# Altium PCB Altium_PCB_v03_CLOCK_4Plane.pcbdoc
Units mil, origin at the board's own origin, x right, y up, seen from the top; angles counter-clockwise.
Board outline 11875.51 x 6799.21 mil, 4 copper layers (Top Layer, GROUND, 5V, Bottom Layer); 41 components, 26 nets, 145 pads, 0 vias.
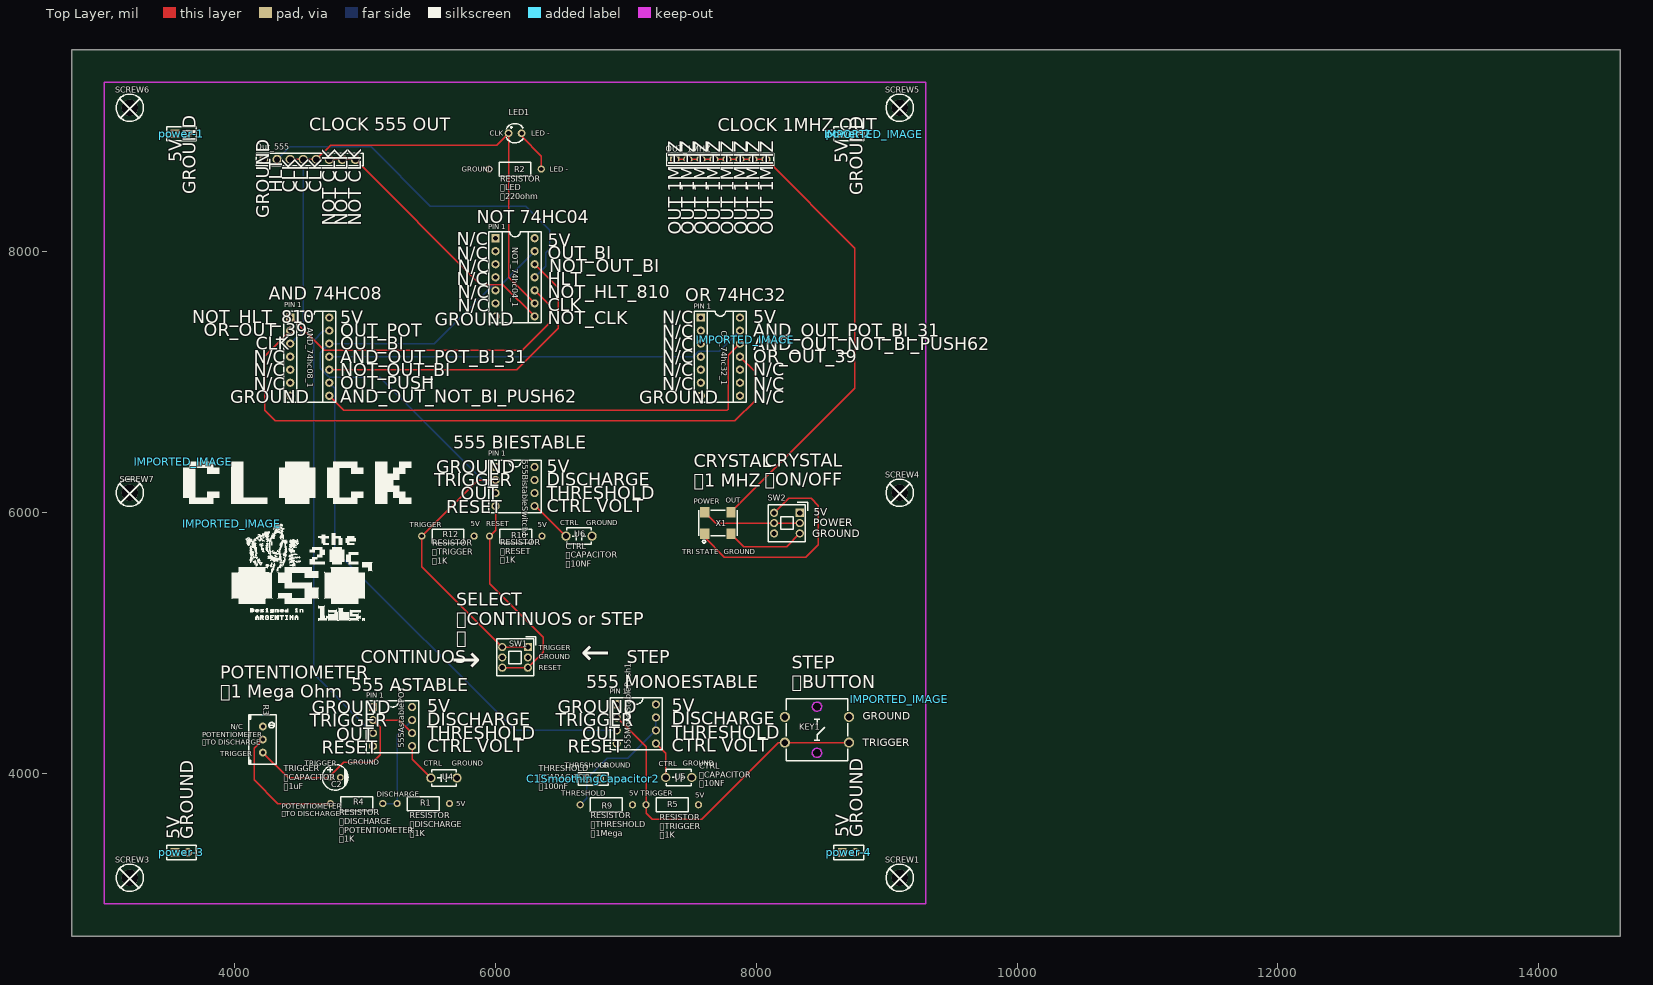
[diagram p0: Top Layer view]
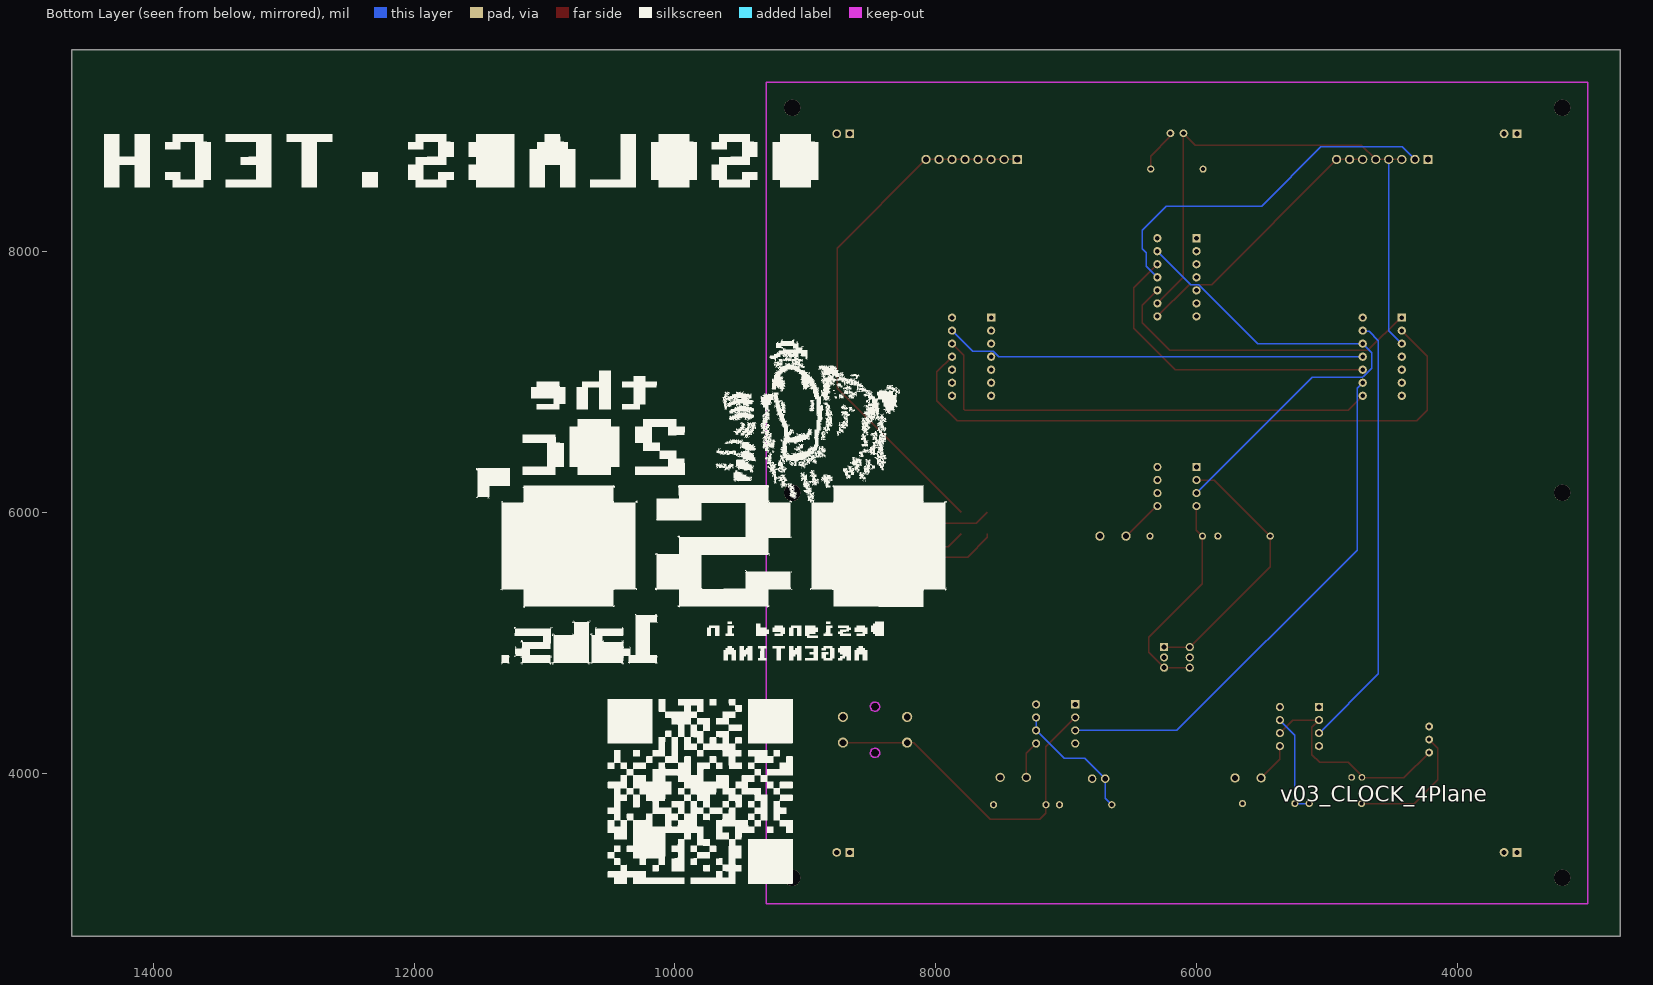
[diagram p1: Bottom Layer view, seen from below]
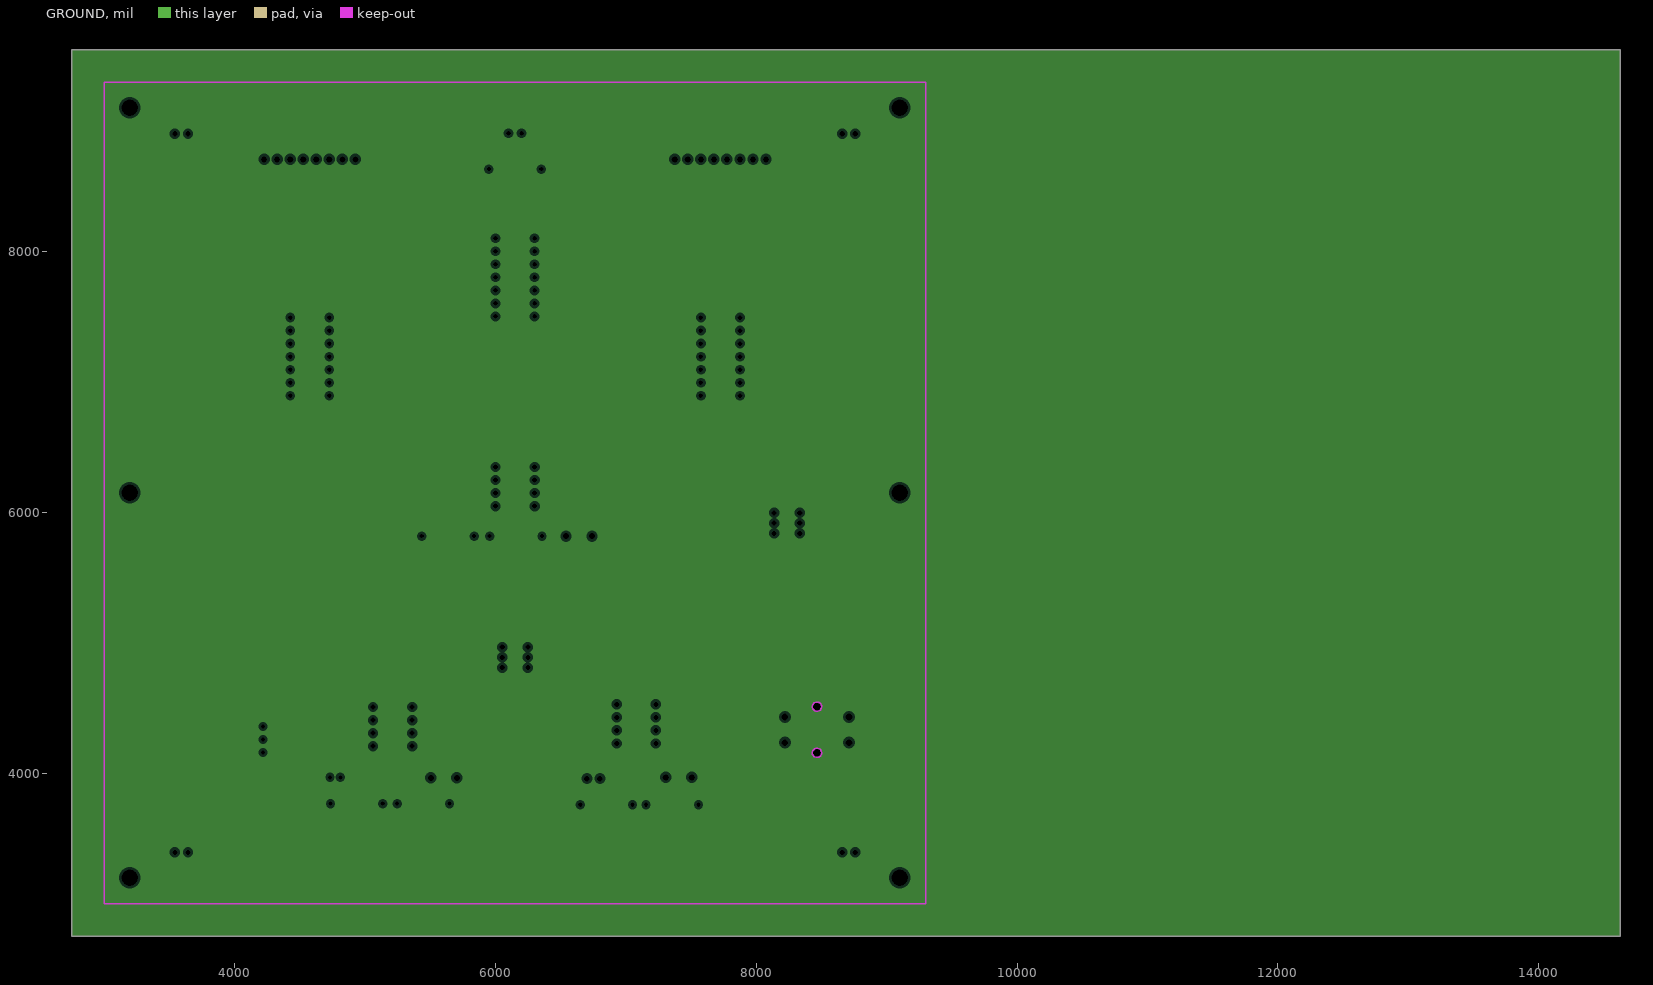
[diagram p2: GROUND, clearances drawn from the general rule]
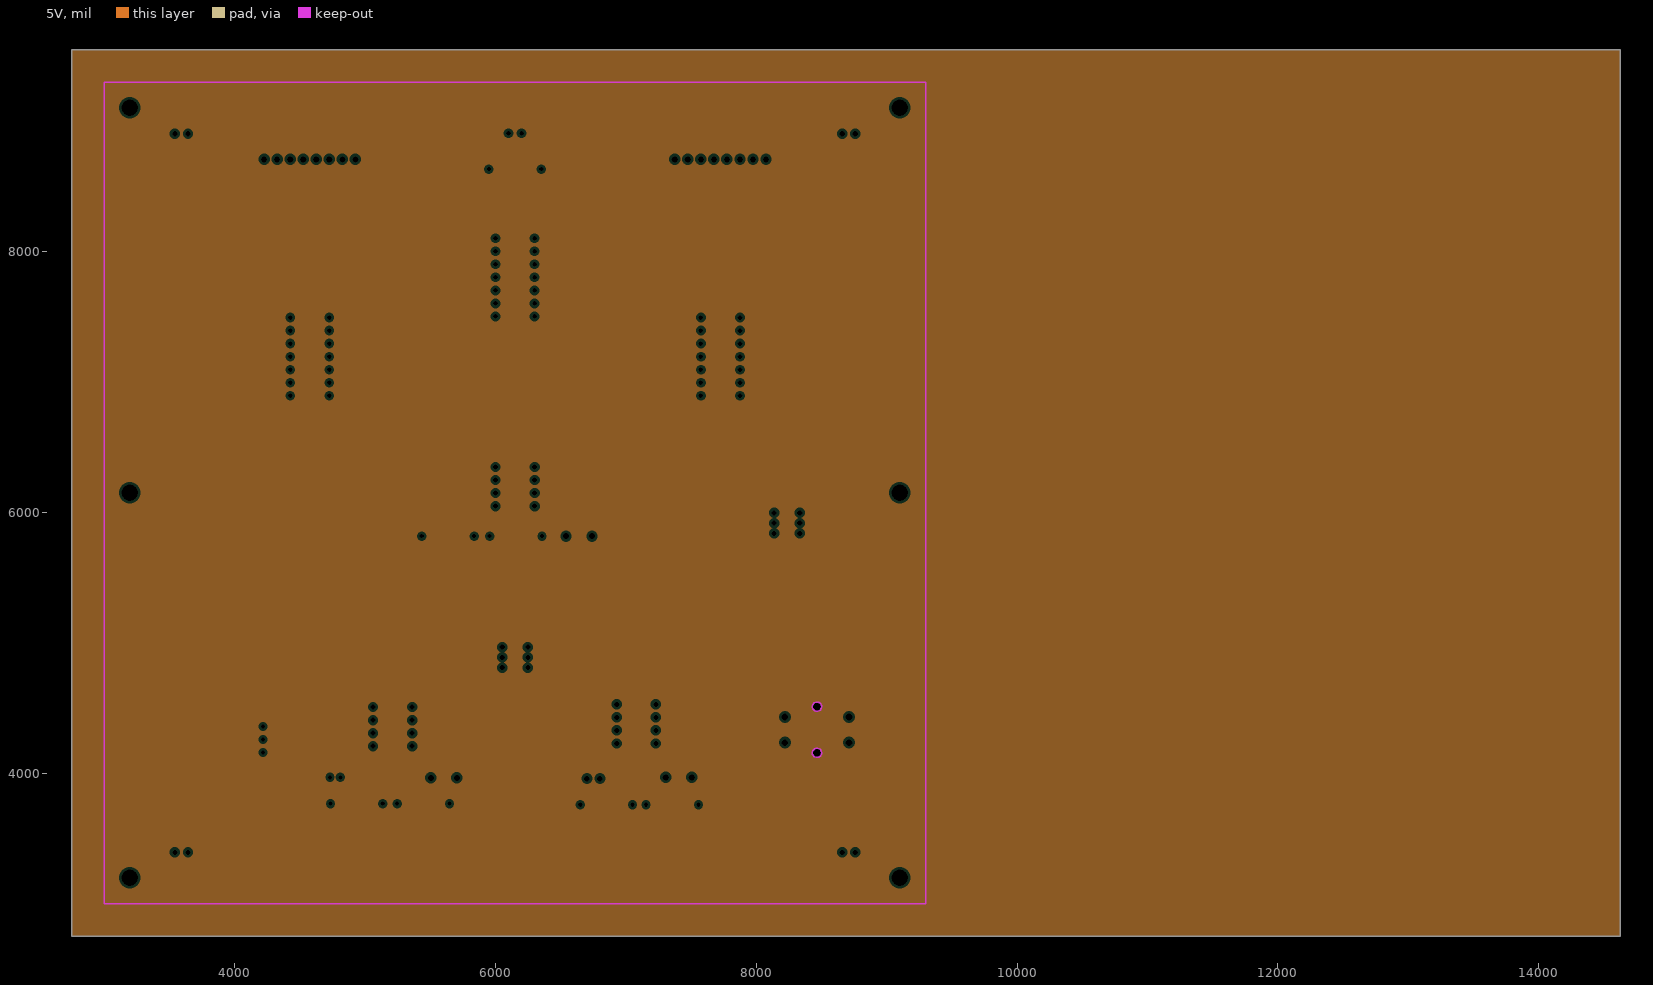
[diagram p3: 5V, clearances drawn from the general rule]

## Layer stack, top to bottom
Top Layer: signal copper (thickness not stored)
Dielectric: dielectric 12.6, FR-4, Dk 4.8
GROUND: plane copper (thickness not stored)
Dielectric: dielectric 12.6, FR-4, Dk 4.8
5V: plane copper (thickness not stored)
Dielectric: dielectric 12.6, FR-4, Dk 4.8
Bottom Layer: signal copper (thickness not stored)

## Board outline
14625.51,2750 2750,2750 2750,9549.21 14625.51,9549.21

## Design rules (kind name [scope] priority, off if disabled: settings)
Clearance copperThickness1oz [All] p1: gap=7 ignorepadtopadclearanceinfootprint=FALSE except(4: Track-Track; 6: Track-SMDPad SMDPad-SMDPad Track-THPad SMDPad-THPad THPad-THPad Track-Via SMDPad-Via THPad-Via Via-Via Track-Fill SMDPad-Fill THPad-Fill Via-Fill Fill-Fill SMDPad-Region THPad-Region Via-Region Fill-Region Region-Region Track-Poly SMDPad-Poly THPad-Poly Via-Poly Fill-Poly Poly-Poly Track-Text SMDPad-Text THPad-Text Via-Text Fill-Text Region-Text Poly-Text Text-Text Track-Hole SMDPad-Hole THPad-Hole Via-Hole Fill-Hole Region-Hole Poly-Hole Text-Hole; 11.8: Track-Region Region-Poly Track-Sheet SMDPad-Sheet THPad-Sheet Via-Sheet Fill-Sheet Region-Sheet Poly-Sheet Text-Sheet Sheet-Hole)
Clearance copperThickness2oz [All] p1: gap=7 ignorepadtopadclearanceinfootprint=FALSE except(6: Track-SMDPad SMDPad-SMDPad Track-THPad SMDPad-THPad THPad-THPad Track-Via SMDPad-Via THPad-Via Via-Via Track-Fill SMDPad-Fill THPad-Fill Via-Fill Fill-Fill SMDPad-Region THPad-Region Via-Region Fill-Region Region-Region Track-Poly SMDPad-Poly THPad-Poly Via-Poly Fill-Poly Poly-Poly Track-Text SMDPad-Text THPad-Text Via-Text Fill-Text Region-Text Poly-Text Text-Text Track-Hole SMDPad-Hole THPad-Hole Via-Hole Fill-Hole Region-Hole Poly-Hole Text-Hole; 8: Track-Track; 11.8: Track-Region Region-Poly Track-Sheet SMDPad-Sheet THPad-Sheet Via-Sheet Fill-Sheet Region-Sheet Poly-Sheet Text-Sheet Sheet-Hole)
DiffPairsRouting differentialPair [All] p1: maxuncoupledlength=10 maxlimit=5.9843 mostfreqgap=5.9843 toplayer_minwidth=5 toplayer_prefwidth=10 toplayer_maxwidth=100 bottomlayer_minwidth=5 bottomlayer_prefwidth=10 bottomlayer_maxwidth=100
PasteMaskExpansion pasteMaskExpansion [All] p1:
PlaneConnect innerPlane [All] p1: planeconnectstyle=Relief reliefexpansion=20 reliefentries=4 reliefconductorwidth=10 reliefairgap=10
PlaneConnect 5VPlane [All] p1: planeconnectstyle=Relief reliefexpansion=20 reliefentries=4 reliefconductorwidth=10 reliefairgap=10
PlaneConnect GroundPlane [All] p1: planeconnectstyle=Relief reliefexpansion=20 reliefentries=4 reliefconductorwidth=10 reliefairgap=10
PolygonConnect copperRegion [All] p1: connectstyle=Relief reliefentries=4 reliefconductorwidth=10 polygonreliefangle="90 Angle" airgapwidth=10
RoutingVias viaSize [All] p1: viastyle="Through Hole" holewidth=12.0078 minholewidth=11.811 maxholewidth=247.9922 width=24.0158 minwidth=19.685 maxwidth=393.7008
SolderMaskExpansion solderMaskExpansion [All] p1: useseparateexpansions=TRUE expansion=2.0079 expansionbottom=2.0079
Width copperThickness1oz [All] p1: maxlimit=100 minlimit=5 preferedwidth=10
Width copperThickness2oz [All] p1: maxlimit=100 minlimit=8 preferedwidth=10

## Components (designator, comment, footprint, x,y, rotation, side; value= is the part's Value field where it differs from the comment)
555AstablePOT "DS1009-08AT1NX-0A2" DIP-8_L10.2-W10.2-P2.54-LS7.6-BL 5209.8,4358.5 r270 top
555BistableSwitch1 "DS1009-08AT1NX-0A2" DIP-8_L10.2-W10.2-P2.54-LS7.6-BL 6149.61,6199.61 r270 top
555MonoStablePush1 "DS1009-08AT1NX-0A2" DIP-8_L10.2-W10.2-P2.54-LS7.6-BL 7079.41,4379.21 r270 top
AND_74hc08_1 "IC-14P窄" DIP-14_L17.8-W10.2-P2.54-BL 4574.8,7195.71 r270 top
C1SmoothingCapacitor2 "CC1H104ZA1ED3F5P1100" CAP-TH_L5.8-W2.4-P2.54-D0.6 6750,3959.21 r0 top
C2 "KF010M050C110A" CAP-TH_BD5.0-P2.00-D0.8-FD 4770,3969.21 r0 top
IMPORTED_IMAGE "IMPORTED_IMAGE" IMPORTED_IMAGE 3975,5914.21 r0 top
IMPORTED_IMAGE "IMPORTED_IMAGE" IMPORTED_IMAGE 3605,6389.21 r0 top
IMPORTED_IMAGE "IMPORTED_IMAGE" IMPORTED_IMAGE 7916.26,7325.71 r0 top
IMPORTED_IMAGE "IMPORTED_IMAGE" IMPORTED_IMAGE 8900.51,8900.51 r0 top
IMPORTED_IMAGE "IMPORTED_IMAGE" IMPORTED_IMAGE 9097.36,4569.8 r0 top
KEY1 "B3F-4055_C84931" KEY-TH_4P-L12.0-W12.0-P5.00-LS13.4-EH 8465,4334.21 r0 top
LED1 "XL-302UYD" LED-TH_BD3.8-P2.54-FD_YELLOW 6149.61,8909.21 r0 top
NOT_74hc04_1 "IC-14P窄" DIP-14_L17.8-W10.2-P2.54-BL 6149.61,7804.61 r270 top
OR_74hc32_1 "IC-14P窄" DIP-14_L17.8-W10.2-P2.54-BL 7724.41,7195.71 r270 top
OUT_1MHZ "2.54-1*8P母环保" HDR-TH_8P-P2.54-V-F-1 7724.41,8708.66 r0 top
Out_555 "2.54-1*8P母环保" HDR-TH_8P-P2.54-V-F-1 4574.8,8708.66 r0 top
power-1 "2.54-1*2P母" HDR-TH_2P-P2.54-V-F 3590.55,8905.51 r0 top
power-2 "2.54-1*2P母" HDR-TH_2P-P2.54-V-F 8708.66,8905.51 r0 top
power-3 "2.54-1*2P母" HDR-TH_2P-P2.54-V-F 3590.55,3393.7 r0 top
power-4 "2.54-1*2P母" HDR-TH_2P-P2.54-V-F 8708.66,3393.7 r0 top
R1 "CR1/4W-1K±5%-ST26" RES-TH_BD2.7-L6.2-P10.20-D0.4 5446.02,3767.95 r0 top
R2 "CR1/4W-220Ω±5%-ST26" RES-TH_BD2.7-L6.2-P10.20-D0.4 6149.61,8634.21 r0 top
R3 "3296W-1-105-8mm" RES-ADJ-TH_3296W 4215,4259.21 r0 top
R4 "CR1/4W-1K±5%-ST26" RES-TH_BD2.7-L6.2-P10.20-D0.4 4934.21,3767.95 r180 top
R5 "CR1/4W-1K±5%-ST26" RES-TH_BD2.7-L6.2-P10.20-D0.4 7355,3759.21 r0 top
R9 "CR1/4W-1M±5%-ST52" RES-TH_BD2.7-L6.2-P10.20-D0.4 6850,3759.21 r180 top
R10 "CR1/4W-1K±5%-ST26" RES-TH_BD2.7-L6.2-P10.20-D0.4 6155,5819.21 r0 top
R12 "CR1/4W-1K±5%-ST26" RES-TH_BD2.7-L6.2-P10.20-D0.4 5635,5819.21 r0 top
SCREW1 "Screw-Hole-M3" Screw-Hole-M3 9102.36,3196.85 r0 top
SCREW3 "Screw-Hole-M3" Screw-Hole-M3 3196.85,3196.85 r0 top
SCREW4 "Screw-Hole-M3" Screw-Hole-M3 9102.36,6149.61 r0 top
SCREW5 "Screw-Hole-M3" Screw-Hole-M3 9102.36,9102.36 r0 top
SCREW6 "Screw-Hole-M3" Screw-Hole-M3 3196.85,9102.36 r0 top
SCREW7 "Screw-Hole-M3" Screw-Hole-M3 3196.85,6149.61 r0 top
SW1 "XKB7070-Z" SW-TH_6P-L7.0-W7.0-P2.00 6149.61,4889.21 r0 top
SW2 "XKB7070-Z" SW-TH_6P-L7.0-W7.0-P2.00 8235,5919.41 r0 top
U4 "CC1H103ZC1ED3F4D1100" CAP-TH_L4.8-W3.2-P5.08-D1.2 5603.5,3964.8 r0 top
U5 "CC1H103ZC1ED3F4D1100" CAP-TH_L4.8-W3.2-P5.08-D1.2 7405,3969.21 r0 top
U6 "CC1H103ZC1ED3F4D1100" CAP-TH_L4.8-W3.2-P5.08-D1.2 6640,5819.21 r0 top
X1 "S7D1.000000A20F30T" OSC-SMD_4P-L7.0-W5.0-BL_7W16070003 7705,5919.41 r0 top

## Footprints (in the part's own frame and the unit in brackets; to place one, negate y for a bottom-side part, rotate by r counter-clockwise, add the part's x,y. Pads: shape width x height; smd on the part's side, far side on the other; paste and mask are expansions set on the pad)
CAP-TH_BD5.0-P2.00-D0.8-FD [mm]
  round 1.3 hole 0.8: 1(-1,0) 2(1,0)
  silkscreen extent -2.5,-2.5 2.5,2.5
CAP-TH_L4.8-W3.2-P5.08-D1.2 [mm]
  round 1.8 hole 1.2: 1(-2.54,0) 2(2.54,0)
  silkscreen extent -2.4,-1.6 2.4,1.6
CAP-TH_L5.8-W2.4-P2.54-D0.6 [mm]
  round 1.65 hole 1.1: 1(-1.27,0) 2(1.27,0)
  silkscreen extent -2.92,-1.27 2.92,1.14
DIP-8_L10.2-W10.2-P2.54-LS7.6-BL [mm]
  rect 1.6x1.6 hole 1: 1(-3.808,-3.81)
  round 1.6 hole 1: 2(-1.27,-3.81) 3(1.27,-3.81) 4(3.81,-3.81) 5(3.81,3.81) 6(1.27,3.81) 7(-1.27,3.81) 8(-3.81,3.81)
  silkscreen extent -5.08,-5.08 5.08,5.08
DIP-14_L17.8-W10.2-P2.54-BL [mil]
  rect 63x63 hole 35.43: 1(-300,-150)
  round 63 hole 35.43: 2(-200,-150) 3(-100,-150) 4(0,-150) 5(100,-150) 6(200,-150) 7(300,-150) 8(300,150) 9(200,150) 10(100,150) 11(0,150) 12(-100,150) 13(-200,150) 14(-300,150)
  silkscreen extent -350,-200 350,200
HDR-TH_2P-P2.54-V-F [mm]
  rect 1.7x1.7 hole 1: 1(-1.27,0)
  round 1.7 hole 1: 2(1.27,0)
  silkscreen extent -2.88,-1.39 2.88,1.4
HDR-TH_8P-P2.54-V-F-1 [mm]
  rect 1.8x1.8 hole 1.2: 1(-8.89,0)
  round 1.8 hole 1.2: 2(-6.35,0) 3(-3.81,0) 4(-1.27,0) 5(1.27,0) 6(3.81,0) 7(6.35,0) 8(8.89,0)
  silkscreen extent -10.41,-1.22 10.41,1.22
IMPORTED_IMAGE [mil]
  silkscreen extent 0,-745 1080,0
KEY-TH_4P-L12.0-W12.0-P5.00-LS13.4-EH [mm]
  round 2 hole 1.3: 1(6.25,-2.5) 2(-6.25,-2.5) 3(6.25,2.5) 4(-6.25,2.5)
  Multi-Layer board cut-out: 0.9,4.5 0.777,4.946 0.448,5.273 0,5.392 -0.448,5.273 -0.777,4.947 -0.9,4.5 -0.9,4.5 -0.777,4.054 -0.448,3.728 0,3.608 0.448,3.727 0.777,4.054 0.9,4.5
  Multi-Layer board cut-out: 0.9,-4.5 0.777,-4.053 0.448,-3.727 0,-3.608 -0.448,-3.727 -0.777,-4.053 -0.9,-4.5 -0.9,-4.5 -0.777,-4.946 -0.448,-5.272 0,-5.392 0.448,-5.272 0.777,-4.946 0.9,-4.5
  Multi-Layer keep-out circle w0.254: c0,4.5 r0.9
  Multi-Layer keep-out circle w0.254: c0,-4.5 r0.9
  silkscreen extent -5.99,-6 6.01,6
LED-TH_BD3.8-P2.54-FD_YELLOW [mil]
  round 60 hole 35.43: 1(-50,0) 2(50,0)
  silkscreen extent -68,-74 63,74
OSC-SMD_4P-L7.0-W5.0-BL_7W16070003 [mm]
  rect 1.8x2 smd: 1(-2.54,-2.1) 2(2.54,-2.1) 3(2.54,2.1) 4(-2.54,2.1)
  silkscreen extent -3.7,-3.9 3.8,2.5
RES-ADJ-TH_3296W [mil]
  round 60 hole 30: 1(0,99.99) 2(0,-0.01) 3(0,-100.01)
  silkscreen extent -108,-190 102,190
RES-TH_BD2.7-L6.2-P10.20-D0.4 [mm]
  round 1.4 hole 0.8 copper offset 0,0: 1(-5.1,0) 2(5.1,0)
  silkscreen extent -3.1,-1.35 3.1,1.35
Screw-Hole-M3 [mil]
  round 126 hole 126: 1(-2.5,2.5)
  silkscreen extent -107,-102 102,107
SW-TH_6P-L7.0-W7.0-P2.00 [mm]
  rect 1.6x1.6 hole 1: 1(2.5,2)
  round 1.6 hole 1: 2(2.5,0) 3(2.5,-2) 4(-2.5,2) 5(-2.5,0) 6(-2.5,-2)
  silkscreen extent -3.6,-3.6 4.06,4.06

## Nets (pads, with @x,y where several pads share a name; then routed paths per layer and width w, separated by ;. In a path a pad name is that pad's centre, name@x,y a point inside that pad or via, vN(x,y) a via of type N, cw(c..) or ccw(c..) an arc to the next point about the centre after c; other vN are vias at no path point)
5V: 555AstablePOT.4 555AstablePOT.8 555BistableSwitch1.8 555MonoStablePush1.4 555MonoStablePush1.8 AND_74hc08_1.14 NOT_74hc04_1.14 OR_74hc32_1.14 power-1.1 power-2.1 power-3.1 power-4.1 R1.2 R5.2 R9.1 R10.2 R12.2 SW2.1 SW2.4 X1.1 | length 1706.2
  Top Layer w10: X1.1 7605,5809.21 7755,5659.21 8380,5659.21 8475,5754.21 8475,6054.21 8420,6109.21 8247.64,6109.21 SW2.4
AND_OUT_NOTBI_PUSH_62: AND_74hc08_1.8 OR_74hc32_1.12 | length 3649.1
  Top Layer w10: AND_74hc08_1.8 4836.3,6784.21 7775,6784.21 7785,6794.21 7785,7206.3 OR_74hc32_1.12
AND_OUT_POT_BI_31: AND_74hc08_1.11 OR_74hc32_1.13 | length 3232.4
  Bottom Layer w10: AND_74hc08_1.11 7514.33,7195.71 7556.81,7238.19 7716.89,7238.19 OR_74hc32_1.13
CLK: AND_74hc08_1.3 LED1.1 NOT_74hc04_1.9 Out_555.3 Out_555.4 Out_555.5 | length 4599.7
  Top Layer w10: Out_555.3 Out_555.4 Out_555.5 4735.35,8819.21 6009.61,8819.21 LED1.1 6099.61,7804.61 NOT_74hc04_1.9
  Bottom Layer w10: AND_74hc08_1.3 4524.8,7395.71 Out_555.4
CTRL_555_1: 
CTRL_BI: 555BistableSwitch1.5 U6.1 | length 335.8
  Top Layer w10: 555BistableSwitch1.5 6309.61,6049.61 U6.1
CTRL_PUSH: 555MonoStablePush1.5 U5.1 | length 291.3
  Top Layer w10: 555MonoStablePush1.5 7305,4153.62 U5.1
DIS_POT: 555AstablePOT.7 R1.1 R4.1 | length 798.2
  Bottom Layer w10: R4.1 R1.1 5245.23,4293.93 555AstablePOT.7
DIS_THR_PUSH: 555MonoStablePush1.6 555MonoStablePush1.7 C1SmoothingCapacitor2.1 R9.2 | length 1003.7
  Bottom Layer w10: R9.2 6700,3810 C1SmoothingCapacitor2.1 6855,4114.21 7014.41,4114.21 555MonoStablePush1.6 555MonoStablePush1.7
GROUND: 555AstablePOT.1 555BistableSwitch1.1 555BistableSwitch1.6 555MonoStablePush1.1 AND_74hc08_1.7 C1SmoothingCapacitor2.2 C2.2 KEY1.3 KEY1.4 NOT_74hc04_1.7 OR_74hc32_1.7 Out_555.1 power-1.2 power-2.2 power-3.2 power-4.2 R2.1 SW1.2 SW1.5 SW2.3 SW2.6 U4.2 U5.2 U6.2 X1.2 | length 610.8
  Top Layer w10: X1.2 7902.52,5739.21 8231.97,5739.21 SW2.3
HLT: NOT_74hc04_1.11 Out_555.2 | length 2802.3
  Bottom Layer w10: Out_555.2 4420.35,8804.21 5045,8804.21 5500,8349.21 6230,8349.21 6415,8164.21 6415,8024.21 6385,7994.21 6385,7890 NOT_74hc04_1.11
LED1SH: LED1.2 R2.2 | length 337.5
  Top Layer w10: LED1.2 6199.61,8884.61 6350.4,8733.82 R2.2
NOT_CLK: NOT_74hc04_1.8 Out_555.6 Out_555.7 Out_555.8 | length 2073.5
  Top Layer w10: Out_555.6 Out_555.7 Out_555.8 5884.25,7749.21 6055,7749.21 NOT_74hc04_1.8
NOT_HLT_810: AND_74hc08_1.1 NOT_74hc04_1.10 | length 2479.5
  Top Layer w10: AND_74hc08_1.1 4433.5,7495.71 4685,7244.21 6205,7244.21 6415,7454.21 6415,7589.21 NOT_74hc04_1.10
NOT_OUT_BI: AND_74hc08_1.10 NOT_74hc04_1.12 | length 2452.2
  Top Layer w10: AND_74hc08_1.10 6161.5,7095.71 6480,7414.21 6480,7724.21 NOT_74hc04_1.12
OR_OUT_39: AND_74hc08_1.2 OR_74hc32_1.11 | length 4933.9
  Top Layer w10: AND_74hc08_1.2 4230,7200.91 4230,6784.21 4310,6704.21 7835,6704.21 7990,6859.21 7990,7080.12 OR_74hc32_1.11
OUT_1MHZ: OUT_1MHZ.1 OUT_1MHZ.2 OUT_1MHZ.3 OUT_1MHZ.4 OUT_1MHZ.5 OUT_1MHZ.6 OUT_1MHZ.7 OUT_1MHZ.8 X1.3 | length 4082
  Top Layer w10: OUT_1MHZ.1 OUT_1MHZ.2 OUT_1MHZ.3 OUT_1MHZ.4 OUT_1MHZ.5 OUT_1MHZ.6 OUT_1MHZ.7 OUT_1MHZ.8 8755,8028.07 8755,6952.08 X1.3
OUT_BI: 555BistableSwitch1.3 AND_74hc08_1.12 NOT_74hc04_1.13 | length 3830.1
  Bottom Layer w10: 555BistableSwitch1.3 5111.02,7038.19 4726.02,7038.19 4720,7044.21 4716.22,7044.21 4655,7105.43 4655,7229.21 4658.31,7229.21 AND_74hc08_1.12 5530.6,7295.71 5981.99,7747.09 6042.09,7747.09 NOT_74hc04_1.13
OUT_POT: 555AstablePOT.3 AND_74hc08_1.13 | length 3350.6
  Bottom Layer w10: AND_74hc08_1.13 4718.31,7389.21 4675,7389.21 4605,7319.21 4605,4763.31 555AstablePOT.3
OUT_PUSH: 555MonoStablePush1.3 AND_74hc08_1.9 | length 4036.2
  Bottom Layer w10: AND_74hc08_1.9 4767.29,6953.22 4767.29,5711.93 6150,4329.21 555MonoStablePush1.3
POTUP: R3.2 R4.2 | length 995.4
  Top Layer w10: R3.2 4150,4194.21 4150,3949.21 4331.26,3767.95 R4.2
POWER_CRYSTAL_5V: SW2.2 SW2.5 X1.4 | length 762.7
  Top Layer w10: X1.4 7687.68,5919.41 SW2.5 SW2.2
RESET_BI: 555BistableSwitch1.4 R10.1 SW1.3 SW1.6 | length 1673.4
  Top Layer w10: 555BistableSwitch1.4 5999.61,5864.61 R10.1 5954.21,5455 6365,5044.21 6365,4927.44 SW1.3 SW1.6
TRIG_2_THR: 555AstablePOT.2 555AstablePOT.6 C2.1 R3.3 | length 1683.4
  Top Layer w10: R3.3 4409.41,3964.8 4717.68,3964.8 4837.09,4084.21 5055,4084.21 5115,4144.21 5115,4353.31 555AstablePOT.2 5259.8,4408.5 555AstablePOT.6
TRIG_BI: 555BistableSwitch1.2 R12.1 SW1.1 SW1.4 | length 2047.3
  Top Layer w10: 555BistableSwitch1.2 5864.6,6249.61 R12.1 5434.21,5584.92 SW1.4 SW1.1
TRIG_PUSH: 555MonoStablePush1.2 KEY1.1 KEY1.2 R5.1 | length 2646.1
  Top Layer w10: 555MonoStablePush1.2 7154.21,4204.41 R5.1 7154.21,3695 7200,3649.21 7580,3649.21 8166.57,4235.79 KEY1.2 KEY1.1
pads on no net: 555AstablePOT.5 555BistableSwitch1.7 AND_74hc08_1.4 AND_74hc08_1.5 AND_74hc08_1.6 NOT_74hc04_1.1 NOT_74hc04_1.2 NOT_74hc04_1.3 NOT_74hc04_1.4 NOT_74hc04_1.5 NOT_74hc04_1.6 OR_74hc32_1.1 OR_74hc32_1.2 OR_74hc32_1.3 OR_74hc32_1.4 OR_74hc32_1.5 OR_74hc32_1.6 OR_74hc32_1.8 OR_74hc32_1.9 OR_74hc32_1.10 R3.1 SCREW1.1 SCREW3.1 SCREW4.1 SCREW5.1 SCREW6.1 SCREW7.1 U4.1
copper on no net: | length 303.2
  Top Layer w10: 5359.8,4208.5 5359.8,4108.5 5503.5,3964.8

## Keep-outs
Board Outline Layer:
  lines w10: 3000,3000 9299.21,3000 9299.21,9299.21 3000,9299.21 3000,3000

## Silkscreen, mask and mechanical layers (free items; w line width, h text height)
Top Silkscreen Layer:
  text "CLOCK 555 OUT" at 4570,8929.21 h98.43
  text "CLOCK 1MHZ OUT" at 7705,8924.21 h98.43
  text "CLK" at 5955,8889.21 h39.37
  text "LED -" at 6275,8889.21 h39.37
  text "5V" at 3591.71,8685.61 h98.43 r90
  text "5V" at 8700,8679.21 h98.43 r90
  text "GROUND" at 5740,8614.21 h39.37
  text "LED -" at 6415,8614.21 h39.37
  text "HLT" at 4365,8454.41 h98.43 r90
  text "CLK" at 4465,8451.61 h98.43 r90
  text "CLK" at 4565,8451.61 h98.43 r90
  text "CLK" at 4665,8451.61 h98.43 r90
  text "GROUND" at 3701.71,8443.41 h98.43 r90
  text "GROUND" at 8815,8434.21 h98.43 r90
  text "RESISTOR /  LED /  220ohm" at 6035,8404.21 h45
  text "GROUND" at 4265,8257.01 h98.43 r90
  text "NOT 74HC04" at 5855,8219.21 h98.43
  text "NOT CLK" at 4770,8199.21 h98.43 r90
  text "NOT CLK" at 4865,8199.21 h98.43 r90
  text "NOT CLK" at 4970,8199.21 h98.43 r90
  text "PIN 1" at 5945,8174.21 h39.37
  text "OUT 1MHZ" at 7425,8129.21 h98.43 r90
  text "OUT 1MHZ" at 7525,8129.21 h98.43 r90
  text "OUT 1MHZ" at 7625,8129.21 h98.43 r90
  text "OUT 1MHZ" at 7725,8129.21 h98.43 r90
  text "OUT 1MHZ" at 7825,8129.21 h98.43 r90
  text "OUT 1MHZ" at 7930,8129.21 h98.43 r90
  text "OUT 1MHZ" at 8025,8129.21 h98.43 r90
  text "OUT 1MHZ" at 8130,8129.21 h98.43 r90
  text "N/C" at 5703.27,8049.78 h98.43
  text "5V" at 6398.44,8040.25 h98.43
  text "OUT_BI" at 6398.44,7943.99 h98.43
  text "N/C" at 5703.27,7939.78 h98.43
  text "NOT_OUT_BI" at 6410,7844.21 h98.43
  text "N/C" at 5708.27,7839.78 h98.43
  text "N/C" at 5703.27,7744.78 h98.43
  text "HLT" at 6398.44,7742.75 h98.43
  text "N/C" at 5708.27,7644.78 h98.43
  text "NOT_HLT_810" at 6398.44,7642.75 h98.43
  text "AND 74HC08" at 4260,7634.21 h98.43
  text "OR 74HC32" at 7455,7619.21 h98.43
  text "PIN 1" at 4380,7574.21 h39.37
  text "PIN 1" at 7520,7564.21 h39.37
  text "CLK" at 6398.44,7542.75 h98.43
  text "N/C" at 5710.22,7538.99 h98.43
  text "NOT_HLT_810" at 3671.97,7450.78 h98.43
  text "N/C" at 7277.92,7449.78 h98.43
  text "5V" at 7978.27,7450.25 h98.43
  text "5V" at 4810.37,7447.94 h98.43
  text "NOT_CLK" at 6398.44,7442.75 h98.43
  text "GROUND" at 5535.22,7433.99 h98.43
  text "OR_OUT_39" at 3760.37,7352.02 h98.43
  text "AND_OUT_POT_BI_31" at 7978.27,7348.99 h98.43
  text "OUT_POT" at 4810.37,7347.02 h98.43
  text "N/C" at 7277.92,7339.78 h98.43
  text "CLK" at 4160.87,7250.78 h98.43
  text "OUT_BI" at 4810.37,7247.02 h98.43
  text "AND_OUT_NOT_BI_PUSH62" at 7978.27,7246.43 h98.43
  text "N/C" at 7277.92,7239.78 h98.43
  text "OR_OUT_39" at 7978.27,7147.75 h98.43
  text "AND_OUT_POT_BI_31" at 4810.37,7147.02 h98.43
  text "N/C" at 4143.97,7145.51 h98.43
  text "N/C" at 7277.92,7144.78 h98.43
  text "N/C" at 7978.27,7049.78 h98.43
  text "NOT_OUT_BI" at 4810.37,7047.02 h98.43
  text "N/C" at 4143.97,7045.51 h98.43
  text "N/C" at 7277.92,7044.78 h98.43
  text "OUT_PUSH" at 4810.37,6947.02 h98.43
  text "N/C" at 4143.97,6939.72 h98.43
  text "N/C" at 7978.27,6939.78 h98.43
  text "N/C" at 7277.92,6938.99 h98.43
  text "AND_OUT_NOT_BI_PUSH62" at 4810.37,6842.02 h98.43
  text "GROUND" at 3966.27,6839.72 h98.43
  text "N/C" at 7978.27,6839.78 h98.43
  text "GROUND" at 7100.22,6833.99 h98.43
  text "555 BIESTABLE" at 5675,6489.21 h98.43
  text "PIN 1" at 5945,6434.21 h39.37
  text "5V" at 6390.85,6306.66 h98.43
  text "GROUND" at 5546.75,6301.66 h98.43
  text "DISCHARGE" at 6390.85,6206.66 h98.43
  text "CRYSTAL /  ON/OFF" at 8065,6204.21 h98.43
  text "TRIGGER" at 5530.85,6201.66 h98.43
  text "CRYSTAL /  1 MHZ" at 7520,6199.21 h98.43
  text "THRESHOLD" at 6390.85,6101.66 h98.43
  text "OUT" at 5732.95,6096.66 h98.43
  text "OUT" at 7765,6074.21 h39.37
  text "POWER" at 7520,6069.21 h39.37
  text "CTRL VOLT" at 6390.85,6001.66 h98.43
  text "RESET" at 5621.95,5996.66 h98.43
  text "5V" at 8440,5974.21 h59.06
  text "CTRL" at 6495,5904.21 h39.37
  text "GROUND" at 6695,5904.21 h39.37
  text "5V" at 5810,5894.21 h39.37
  text "RESET" at 5930,5894.21 h39.37
  text "POWER" at 8435,5894.21 h59.06
  text "TRIGGER" at 5340,5889.21 h39.37
  text "5V" at 6325,5889.21 h39.37
  text "GROUND" at 8430,5809.21 h59.06
  text "TRI STATE" at 7430,5679.21 h39.37
  text "GROUND" at 7750,5679.21 h39.37
  text "RESISTOR /  RESET /  1K" at 6035,5614.21 h45
  text "RESISTOR /  TRIGGER /  1K" at 5515,5609.21 h45
  text "CTRL  /  CAPACITOR /  10NF" at 6540,5584.21 h45
  text "→" at 6880,5004.21 h196.85 r180
  text "SELECT /  CONTINUOS or STEP /  " at 5700,4989.21 h98.43
  text "TRIGGER" at 6330,4944.21 h39.37
  text "GROUND" at 6330,4874.21 h39.37
  text "CONTINUOS" at 4965,4844.21 h98.43
  text "STEP" at 7005,4844.21 h98.43
  text "RESET" at 6330,4789.21 h39.37
  text "→" at 5665,4784.21 h196.85
  text "555 MONOESTABLE" at 6695,4654.21 h98.43
  text "STEP /  BUTTON" at 8270,4654.21 h98.43
  text "555 ASTABLE" at 4895,4629.21 h98.43
  text "PIN 1" at 6875,4609.21 h39.37
  text "POTENTIOMETER /  1 Mega Ohm" at 3890,4579.21 h98.43
  text "PIN 1" at 5010,4579.21 h39.37
  text "5V" at 7350.85,4471.66 h98.43
  text "5V" at 5475.85,4466.66 h98.43
  text "GROUND" at 6476.75,4461.66 h98.43
  text "GROUND" at 4591.75,4456.66 h98.43
  text "GROUND" at 8815,4409.21 h59.06
  text "DISCHARGE" at 7350.85,4371.66 h98.43
  text "DISCHARGE" at 5475.85,4366.66 h98.43
  text "TRIGGER" at 6460.85,4361.66 h98.43
  text "TRIGGER" at 4575.85,4356.66 h98.43
  text "N/C" at 3970,4339.21 h39.37
  text "THRESHOLD" at 7350.85,4266.66 h98.43
  text "THRESHOLD" at 5475.85,4261.66 h98.43
  text "OUT" at 6662.95,4256.66 h98.43
  text "OUT" at 4777.95,4251.66 h98.43
  text "POTENTIOMETER /  TO DISCHARGE" at 3750,4219.21 h39.37
  text "TRIGGER" at 8815,4209.21 h59.06
  text "CTRL VOLT" at 7350.85,4166.66 h98.43
  text "CTRL VOLT" at 5475.85,4161.66 h98.43
  text "RESET" at 6551.95,4156.66 h98.43
  text "RESET" at 4666.95,4151.66 h98.43
  text "TRIGGER" at 3890,4129.21 h39.37
  text "GROUND" at 4865,4064.21 h39.37
  text "TRIGGER" at 4535,4059.21 h39.37
  text "CTRL" at 5450,4059.21 h39.37
  text "GROUND" at 5665,4059.21 h39.37
  text "GROUND" at 7435,4059.21 h39.37
  text "CTRL" at 7250,4054.21 h39.37
  text "THRESHOLD" at 6530,4044.21 h39.37
  text "GROUND" at 6795,4044.21 h39.37
  text "CTRL  /  CAPACITOR /  10NF" at 7562.01,3899.8 h45
  text "TRIGGER /  CAPACITOR /  1uF" at 4375,3879.21 h45
  text "THRESHOLD /  CAPACITOR /  100nF" at 6330,3879.21 h45
  text "THRESHOLD" at 6505,3829.21 h39.37
  text "5V" at 7025,3829.21 h39.37
  text "TRIGGER" at 7115,3829.21 h39.37
  text "DISCHARGE" at 5090,3819.21 h39.37
  text "5V" at 7530,3814.21 h39.37
  text "5V" at 5700,3749.21 h39.37
  text "POTENTIOMETER /  TO DISCHARGE" at 4360,3669.21 h39.37
  text "RESISTOR /  DISCHARGE /  1K" at 5340,3519.21 h45
  text "RESISTOR /  THRESHOLD /  1Mega" at 6730,3519.21 h45
  text "5V" at 8710.37,3511.61 h98.43 r90
  text "GROUND" at 8815.37,3511.61 h98.43 r90
  text "RESISTOR /  TRIGGER /  1K" at 7260,3504.21 h45
  text "5V" at 3577.26,3495.5 h98.43 r90
  text "GROUND" at 3682.26,3495.5 h98.43 r90
  text "RESISTOR /  DISCHARGE /  POTENTIOMETER /  1K" at 4800,3474.21 h45
Bottom Silkscreen Layer:
  text "v03_CLOCK_4Plane" at 5357.2,3782.4 h120